# Allegro board MAIN.brd
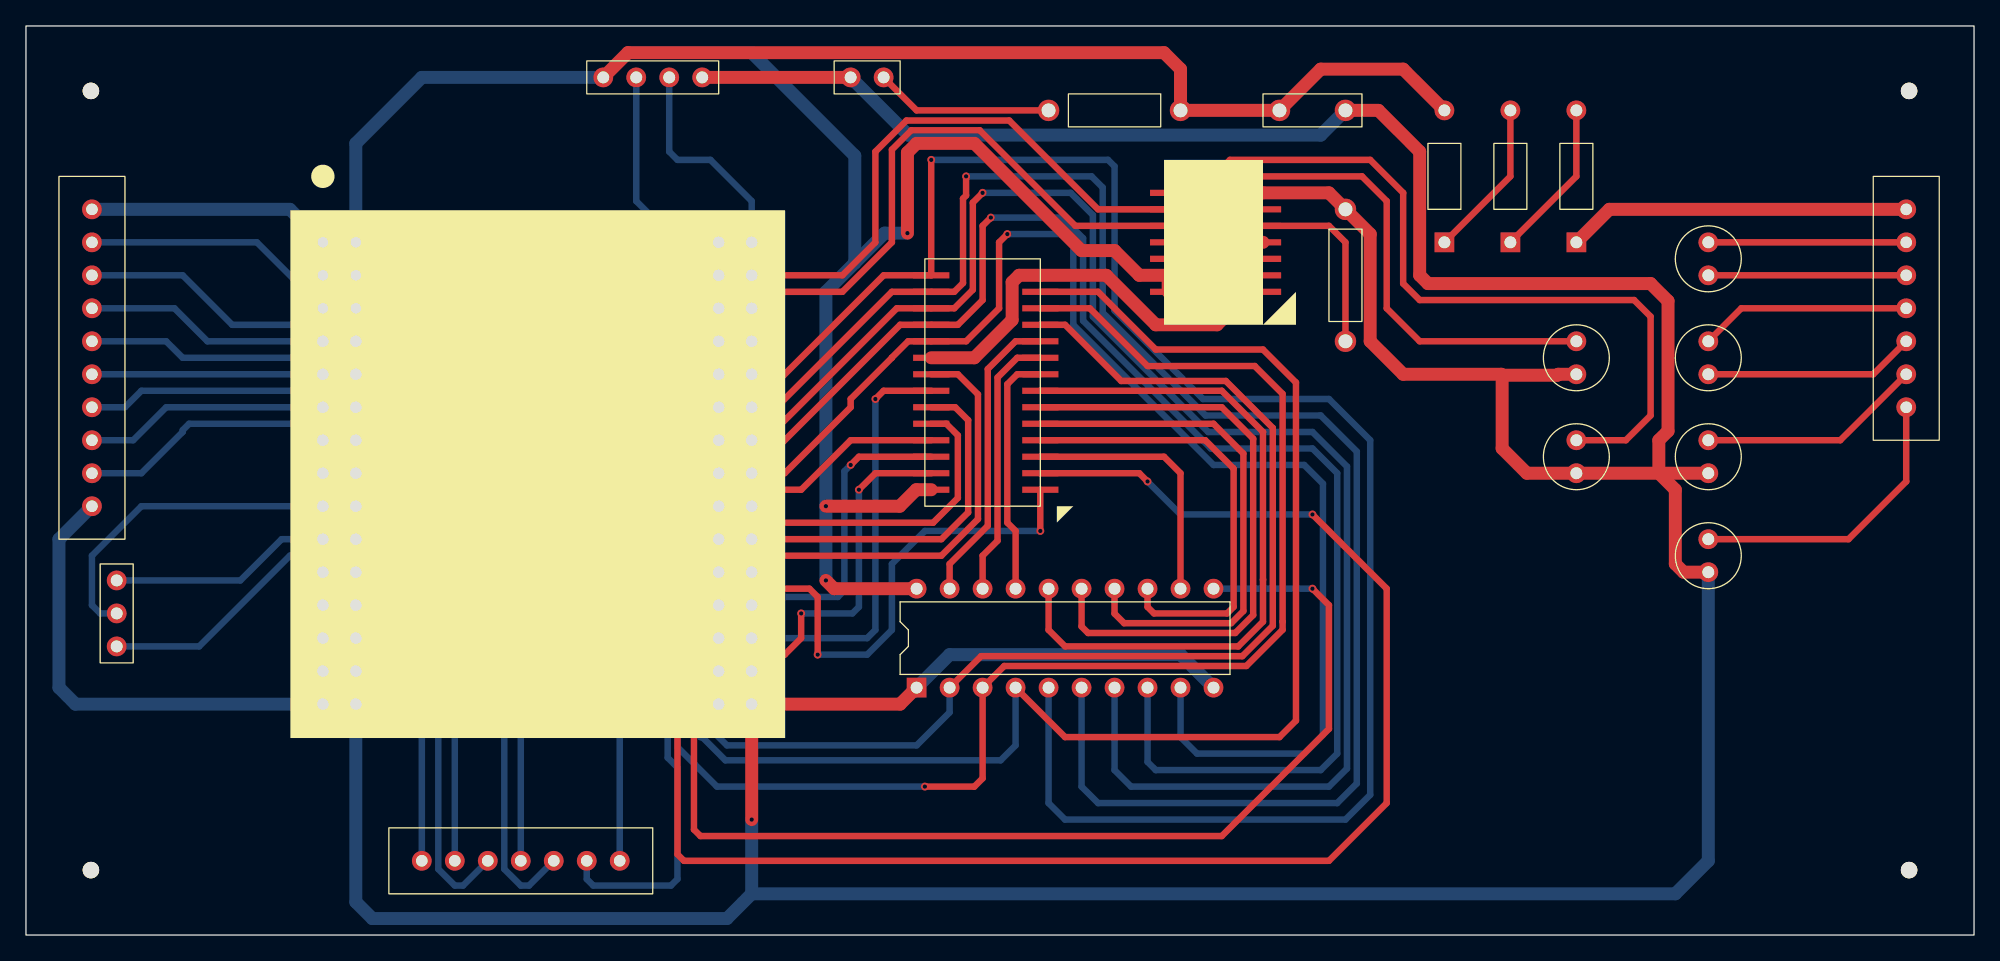
[diagram p0: board, top side]
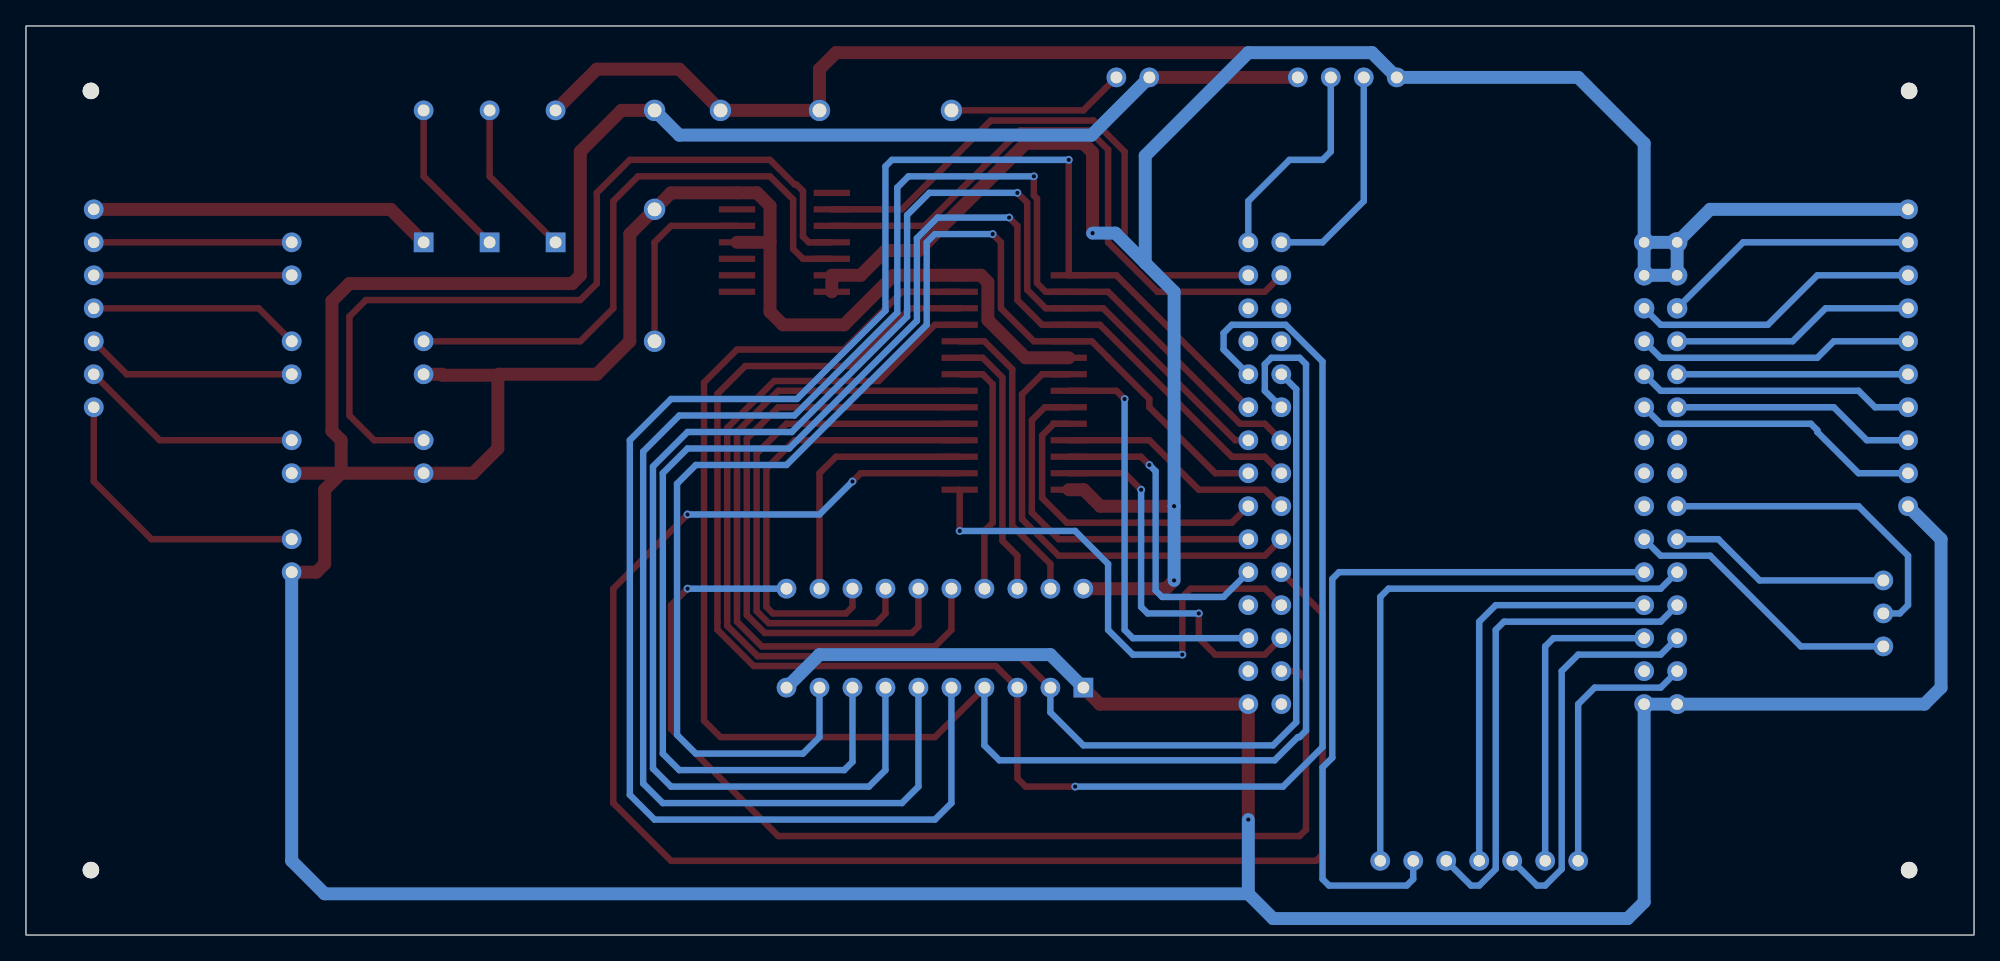
[diagram p1: board, bottom side, seen from below]

Outline 150 x 70 mm; copper layers: TOP, BOTTOM. Coordinates in mm from the lower left corner of the outline.
Outline path: rectangle 0,0 150,70

## Design rules (mm)
nets with their own width: min track width 1; nets GND VCC VDD

## Placement (name value [footprint] x y rotation side)
C1  4.7uF/6.3V  [CAP196]  129.54 53.34 180 top
C2  0.01uF  [CAPCK06]  101.6 63.5 90 top
C3  4.7uF/6.3V  [CAP196]  129.54 45.72 180 top
C4  0.1uF/25V  [CAP196]  129.54 30.48 180 top
C5  0.1uF/25V  [CAP196]  129.54 38.1 180 top
C6  0.05uF  [CAP196]  119.38 38.1 180 top
C7  0.05uF  [CAP196]  119.38 45.72 180 top
D1  DIODE  [DIO400]  109.22 53.34 0 top
D2  DIODE  [DIO400]  114.3 53.34 0 top
D3  DIODE  [DIO400]  119.38 53.34 0 top
IC1  IS62C256AL_45ULI  [SOIC127P1210X305-28N]  78.11 34.29 90 top
J1  CON_LCDBIAS  [JUMPER7]  144.78 55.88 270 top
J2  CON_LCDAK  [JUMPER2]  63.5 66.04 0 top
J3  CON_RESERVED  [JUMPER10]  5.08 55.88 270 top
J4  CON4  [JUMPER4]  44.45 66.04 0 top
J5  CON_DEVICE0  [JUMPER3]  6.99 27.3 270 top
J6  CON_LCDDATA  [JUMPER7]  45.72 5.71 180 top
NOREF  -  []  0 0 90 top
NOREF#2  -  [unnamed#2]  5 5 0 top
NOREF#3  -  []  145 65 0 top
NOREF#4  -  []  0 70 0 top
NOREF#5  -  [unnamed#2]  145 5 0 top
NOREF#6  -  []  0 0 90 top
NOREF#7  -  [unnamed#2]  145 65 0 top
NOREF#8  -  []  0 70 0 top
NOREF#9  -  []  5 65 90 top
NOREF#10  -  [unnamed#2]  5 65 0 top
R1  330  [RES400]  88.9 63.5 90 top
R2  1.25M  [RES400]  101.6 55.88 180 top
U1  ADXL202  [QC14LD]  95.25 49.53 90 top
U2  -  [ATMEGA128MCU]  22.86 53.34 270 top
U3  74HC573  [DIP20_3]  68.58 19.05 90 top

## Library data of the parts
C1 C3-C7 = CAP: Tolerance: ***; User Part Number: ***
C2 = CAP NP: Tolerance: ***; User Part Number: ***
D1-D3 = DIODE
IC1 = IS62C256AL_45ULI
J1 J6 = CON7
J2 = CON2: User Part Number: ***
J3 = CON10
J4 = CON4: User Part Number: ***
J5 = CON3: User Part Number: ***
R1 R2 = RESISTOR: Tolerance: ***; User Part Number: ***
U1 = ADXL202
U2 = ATMEGA128MCU
U3 = 74HC573: Tolerance: ***; User Part Number: ***

## Footprints (pads in the part's own frame, mm; a bottom-side part is the same pattern mirrored in y, then rotated)
ATMEGA128MCU
  round 1.575 hole 0.813: 1(0,0) 2(0,2.54) 3(2.54,0) 4(2.54,2.54) 5(5.08,0) 6(5.08,2.54)
  round 1.524 hole 0.889: 7(7.62,0) 8(7.62,2.54) 9(10.16,0) 10(10.16,2.54) 11(12.7,0) 12(12.7,2.54) 13(15.24,0) 14(15.24,2.54) 15(17.78,0) 16(17.78,2.54) 17(20.32,0) 18(20.32,2.54) 19(22.86,0) 20(22.86,2.54) 21(25.4,0) 22(25.4,2.54) 23(27.94,0) 24(27.94,2.54) 25(30.48,0) 26(30.48,2.54) 27(33.02,0) 28(33.02,2.54) 29(35.56,0) 30(35.56,2.54) 31(0,30.48) 32(0,33.02) 33(2.54,30.48) 34(2.54,33.02) 35(5.08,30.48) 36(5.08,33.02) 37(7.62,30.48) 38(7.62,33.02) 39(10.16,30.48) 40(10.16,33.02) 41(12.7,30.48) 42(12.7,33.02) 43(15.24,30.48) 44(15.24,33.02) 45(17.78,30.48) 46(17.78,33.02) 47(20.32,30.48) 48(20.32,33.02) 49(22.86,30.48) 50(22.86,33.02) 51(25.4,30.48) 52(25.4,33.02) 53(27.94,30.48) 54(27.94,33.02) 55(30.48,30.48) 56(30.48,33.02) 57(33.02,30.48) 58(33.02,33.02) 59(35.56,30.48) 60(35.56,33.02)
CAP196
  round 1.524 hole 0.914: 1(0,0) 2(0,2.54)
CAPCK06
  round 1.651 hole 1.067: 1(0,0) 2(0,5.08)
DIO400
  rect 1.524x1.524 hole 0.914: 1(0,0)
  round 1.524 hole 0.914: 2(0,10.16)
DIP20_3
  rect 1.524x1.524 hole 0.914: 1(0,0)
  round 1.524 hole 0.914: 2(0,-2.54) 3(0,-5.08) 4(0,-7.62) 5(0,-10.16) 6(0,-12.7) 7(0,-15.24) 8(0,-17.78) 9(0,-20.32) 10(0,-22.86) 11(7.62,-22.86) 12(7.62,-20.32) 13(7.62,-17.78) 14(7.62,-15.24) 15(7.62,-12.7) 16(7.62,-10.16) 17(7.62,-7.62) 18(7.62,-5.08) 19(7.62,-2.54) 20(7.62,0)
JUMPER2
  round 1.524 hole 0.914: 1(0,0) 2(2.54,0)
JUMPER3
  round 1.524 hole 0.914: 1(0,0) 2(2.54,0) 3(5.08,0)
JUMPER4
  round 1.524 hole 0.914: 1(0,0) 2(2.54,0) 3(5.08,0) 4(7.62,0)
JUMPER7
  round 1.524 hole 0.889: 1(0,0) 2(2.54,0) 3(5.08,0) 4(7.62,0) 5(10.16,0) 6(12.7,0) 7(15.24,0)
JUMPER10
  round 1.524 hole 0.889: 1(0,0) 2(2.54,0) 3(5.08,0) 4(7.62,0) 5(10.16,0) 6(12.7,0) 7(15.24,0) 8(17.78,0) 9(20.32,0) 10(22.86,0)
QC14LD
  rect 0.483x2.794 smd: 1(0,0) 2(1.27,0) 3(2.54,0) 4(3.81,0) 5(5.08,0) 6(6.35,0) 7(7.62,0) 8(7.62,7.3) 9(6.35,7.3) 10(5.08,7.3) 11(3.81,7.3) 12(2.54,7.3) 13(1.27,7.3) 14(0,7.3)
RES400
  round 1.651 hole 1.067: 1(0,0) 2(0,10.16)
SOIC127P1210X305-28N
  rect 0.483x2.794 smd: 1(0,0) 2(1.27,0) 3(2.54,0) 4(3.81,0) 5(5.08,0) 6(6.35,0) 7(7.62,0) 8(8.89,0) 9(10.16,0) 10(11.43,0) 11(12.7,0) 12(13.97,0) 13(15.24,0) 14(16.51,0) 15(16.51,8.4) 16(15.24,8.4) 17(13.97,8.4) 18(12.7,8.4) 19(11.43,8.4) 20(10.16,8.4) 21(8.89,8.4) 22(7.62,8.4) 23(6.35,8.4) 24(5.08,8.4) 25(3.81,8.4) 26(2.54,8.4) 27(1.27,8.4) 28(0,8.4)
unnamed#2
  round 1.27 hole 3.962 unplated: (0,0)

## Nets
GND: C2.1 C4.2 C5.2 C6.2 C7.2 IC1.14(GND) IC1.20(C\E\) J2.1 J3.10 J4.4 R2.1 U1.4(COM) U1.7(COM2) U2.29(GND0) U2.30(GND1) U2.60(GND2) U3.1(O\E\) U3.10
VCC: C2.2 D1.2(A) IC1.28(VDD) J3.1 J4.1 R1.1 U1.13(VDD) U1.14(VDD2) U2.1(VCC0) U2.2(VCC1) U2.3(AVCC) U2.4(AREF) U3.20
VDD: D3.1(K) J1.1
A8: IC1.25(A8) U2.47(C0)
A9: IC1.24(A9) U2.48(C1)
A10: IC1.21(A10) U2.49(C2)
A11: IC1.23(A11) U2.50(C3)
A12: IC1.2(A12) U2.51(C4)
A13: IC1.26(A13) U2.52(C5)
A14: IC1.1(A14) U2.53(C6)
ACCL_X: U1.10(XOUT) U2.33(F2)
ACCL_Y: U1.9(YOUT) U2.34(F3)
DA0: IC1.11(I_O0) U2.39(A0) U3.2(D0)
DA1: IC1.12(I_O1) U2.40(A1) U3.3(D1)
DA2: IC1.13(I_O2) U2.41(A2) U3.4(D2)
DA3: IC1.15(I_O3) U2.42(A3) U3.5(D3)
DA4: IC1.16(I_O4) U2.43(A4) U3.6(D4)
DA5: IC1.17(I_O5) U2.44(A5) U3.7(D5)
DA6: IC1.18(I_O6) U2.45(A6) U3.8(D6)
DA7: IC1.19(I_O7) U2.46(A7) U3.9(D7)
FSR0: J4.2 U2.31(F0)
FSR1: J4.3 U2.32(F1)
LCDCD: J6.7 U2.27(D6)
LCDD0: J6.1 U2.21(D0)
LCDD1: J6.2 U2.22(D1)
LCDD2: J6.3 U2.23(D2)
LCDD3: J6.4 U2.24(D3)
LCDWR0: J6.5 U2.25(D4)
LCDWR1: J6.6 U2.26(D5)
OE_: IC1.22(O\E\) U2.56(G1)
SARVO: J5.1 U2.19(B6)
SPK0: J5.2 U2.17(B4)
SPK1: J5.3 U2.20(B7)
VB0+: C3.1 J1.4
VB0-: C3.2 J1.5
VB1+: C1.1 J1.2
VB1-: C1.2 J1.3
VBIAS: C4.1 J1.7
VLCD: C5.1 J1.6
WR_: IC1.27(W\E\) U2.55(G0)
N06229: IC1.10(A0) U3.19(Q0)
N06233: IC1.9(A1) U3.18(Q1)
N06239: IC1.7(A3) U3.16(Q3)
N06243: IC1.8(A2) U3.17(Q2)
N06251: IC1.3(A7) U3.12(Q7)
N06255: IC1.5(A5) U3.14(Q5)
N06259: IC1.6(A4) U3.15(Q4)
N06263: IC1.4(A6) U3.13(Q6)
N06273: U2.57(G2) U3.11(L\E\)
N08119: D2.1(K) D3.2(A)
N08145: D1.1(K) D2.2(A)
N08304: J2.2 R1.2
N12621: J3.2 U2.5(E0)
N12677: J3.3 U2.6(E1)
N12689: J3.4 U2.7(E2)
N13066: J3.5 U2.8(E3)
N13078: J3.6 U2.9(E4)
N13592: J3.7 U2.10(E5)
N13604: J3.8 U2.11(E6)
N13619: J3.9 U2.12(E7)
N15084: C6.1 U1.11(YFILT)
N15088: C7.1 U1.12(XFILT)
N15670: R2.2 U1.5(T2)

Pads without a net: U1 1 2 3 6 8; U2 13 14 15 16 18 28 35 36 37 38 54 58 59

## Via types
v1: diameter 0.61, hole 0.33, TOP to BOTTOM, 19 vias

## Routing (per net, layer and track width the routed paths; a pad name or vN(x,y) marks a point on that pad's centre or on a via; arc(x,y) is an arc through that point)
GND: length 447.8
  TOP w1: v1(55.88,8.89) U2.60 67.31,17.78 U3.1 ; IC1.20 73.03,44.45 75.93,47.36 75.93,50.27 76.47,50.8 IC1.14 83.19,50.8 87,46.99 91.71,46.99 92.71,47.99 92.71,53.34 ; 125.73,35.56 C5.2 ; 125.73,35.56 125.73,38.1 126.44,38.81 126.44,48.82 125.09,50.16 107.95,50.16 107.31,50.8 107.31,60.33 104.14,63.5 C2.1 ; 125.73,35.56 C6.2 115.57,35.56 113.67,37.47 113.67,43.11 ; 125.73,35.56 127,34.29 127,28.57 127.64,27.94 C4.2 ; 92.71,53.34 U1.4 ; 92.71,53.34 92.71,56.15 93.71,57.15 U1.7 100.33,57.15 R2.1 103.5,53.98 103.5,45.72 106.05,43.18 113.59,43.18 113.67,43.11 ; 113.67,43.11 117.92,43.11 117.99,43.18 C7.2 ; J2.1 J4.4
  BOTTOM w1: J2.1 67.94,61.59 99.69,61.59 C2.1 ; v1(55.88,8.89) 55.88,3.17 ; 55.88,3.17 53.98,1.27 26.67,1.27 25.4,2.54 U2.30 U2.29 3.81,17.78 2.54,19.05 2.54,30.48 J3.10 ; 55.88,3.17 127,3.17 129.54,5.71 C4.2 ; U3.1 71.12,21.59 88.9,21.59 U3.10
VCC: length 239.7
  TOP w1: v1(67.87,54.05) 67.87,60.25 68.58,60.96 73.03,60.96 81.28,52.7 83.82,52.7 85.72,50.8 U1.13 U1.14 ; D1.2 106.05,66.67 99.69,66.67 C2.2 R1.1 88.9,66.67 87.63,67.94 46.35,67.94 J4.1 ; v1(61.59,27.3) 62.23,26.67 U3.20 ; v1(61.59,33.02) 67.28,33.02 68.55,34.29 IC1.28
  BOTTOM w1: U2.1 20.32,55.88 J3.1 ; U2.1 U2.2 ; U2.1 U2.3 U2.4 U2.2 ; U2.2 25.4,60.96 30.48,66.04 J4.1 46.35,67.94 55.88,67.94 63.82,60.01 63.82,51.75 ; 63.82,51.75 61.59,49.53 v1(61.59,33.02) v1(61.59,27.3) ; 63.82,51.75 66.11,54.05 v1(67.87,54.05)
VDD: length 26.5
  TOP w1: J1.1 121.92,55.88 D3.1
A8: length 18.5
  TOP w0.5: IC1.25 63.5,38.1 59.69,34.29 54.61,34.29 U2.47
A9: length 24.4
  TOP w0.5: IC1.24 70.86,39.37 71.75,38.48 71.75,33.66 69.85,31.75 57.15,31.75 U2.48
A10: length 35.5
  TOP w0.5: IC1.21 71.75,43.18 73.3,41.63 73.3,32.03 70.49,29.21 54.61,29.21 U2.49
A11: length 27.9
  TOP w0.5: IC1.23 71.55,40.64 72.55,39.64 72.55,32.54 70.48,30.48 U2.50
A12: length 126.6
  TOP w0.5: v1(86.36,34.92) 85.72,35.56 IC1.2 ; v1(99.06,32.38) 104.78,26.67 104.78,10.16 100.33,5.71 50.66,5.71 50.16,6.21 50.16,24.77 U2.51
  BOTTOM w0.5: v1(99.06,32.38) 88.9,32.38 v1(86.36,34.92)
A13: length 24.5
  TOP w0.5: IC1.26 64.14,36.83 v1(63.5,36.2)
  BOTTOM w0.5: v1(63.5,36.2) 63.02,35.71 63.02,26.54 62.52,26.04 57.78,26.04 U2.52
A14: length 40.1
  TOP w0.5: U2.53 54.61,26.67 60.33,26.67 60.96,26.04 v1(60.96,21.59) ; IC1.1 v1(78.11,31.11)
  BOTTOM w0.5: v1(60.96,21.59) 64.77,21.59 66.67,23.5 66.67,28.57 69.22,31.11 v1(78.11,31.11)
ACCL_X: length 47.5
  TOP w0.5: U2.33 54.61,49.53 62.87,49.53 66.67,53.34 66.67,60.48 68.17,61.97 73.44,61.97 80.8,54.61 U1.10
ACCL_Y: length 43.9
  TOP w0.5: U2.34 62.87,50.8 65.41,53.34 65.41,60.33 67.8,62.72 75.71,62.72 82.55,55.88 U1.9
DA0: length 113.2
  TOP w0.5: IC1.11 80.01,46.99 84.34,42.66 92.39,42.66 96,39.05 96,23.82 93.66,21.47 73.54,21.47 U3.2
  BOTTOM w0.5: U3.2 71.12,17.14 68.58,14.61 53.98,14.61 52.19,16.39 52.19,42.03 U2.39
DA1: length 139.2
  TOP w0.5: IC1.12 81.92,48.26 86.36,43.81 94.61,43.81 96.76,41.67 96.76,24.13 96.76,24.13 96.76,23.51 93.97,20.72 75.33,20.72 U3.3 73.66,12.06 73.03,11.43 v1(69.22,11.43)
  BOTTOM w0.5: v1(69.22,11.43) 53.2,11.43 50.16,14.47 50.16,44.16 53,46.99 57.15,46.99 57.78,46.35 57.78,45.09 U2.40
DA2: length 138.6
  TOP w0.5: IC1.13 82.55,49.53 87,45.09 95.25,45.09 97.79,42.55 97.79,16.51 96.52,15.24 80.01,15.24 U3.4
  BOTTOM w0.5: U2.41 54.61,41.91 54.61,43.95 54.11,44.45 51.94,44.45 51.44,43.95 51.44,15.74 51.94,15.24 52.07,15.24 53.86,13.45 75.05,13.45 76.2,14.61 U3.4
DA3: length 138.4
  TOP w0.5: v1(69.7,59.69) IC1.15 66.04,50.8 U2.42
  BOTTOM w0.5: U3.5 78.74,10.16 80.01,8.89 101.6,8.89 103.5,10.79 103.5,38.1 100.33,41.27 90.63,41.27 83.82,48.08 83.82,59.19 83.32,59.69 v1(69.7,59.69)
DA4: length 132.2
  TOP w0.5: v1(72.39,58.42) 72.39,56.95 72.15,56.71 72.15,50.2 71.48,49.53 IC1.16 66.67,49.53 56.52,39.37 54.61,39.37 U2.43
  BOTTOM w0.5: v1(72.39,58.42) 82.05,58.42 82.91,57.56 82.91,47.93 90.83,40.01 99.69,40.01 102.47,37.23 102.47,11.67 100.97,10.16 82.55,10.16 81.28,11.43 U3.6
DA5: length 119.6
  TOP w0.5: U2.44 56.89,38.1 67.05,48.26 IC1.17 71.48,48.26 72.91,49.69 72.91,56.4 v1(73.66,57.15)
  BOTTOM w0.5: v1(73.66,57.15) 80.44,57.15 82.15,55.44 82.15,47.62 91.03,38.73 99.06,38.73 101.72,36.08 101.72,12.82 100.33,11.43 85.09,11.43 83.82,12.7 U3.7
DA6: length 113.7
  TOP w0.5: U2.45 54.61,36.83 57.15,36.83 67.31,46.99 IC1.18 71.75,46.99 73.66,48.9 73.66,54.61 v1(74.3,55.24)
  BOTTOM w0.5: U3.8 86.36,13.34 87,12.7 99.69,12.7 100.97,13.97 100.97,35.56 99.06,37.47 91.24,37.47 81.4,47.3 81.4,53.65 79.81,55.24 v1(74.3,55.24)
DA7: length 101.9
  TOP w0.5: v1(75.56,53.98) 74.93,53.34 74.93,48.26 72.39,45.72 IC1.19 67.93,45.72 66.67,44.47 66.67,44.45 63.5,41.27 63.5,40.64 58.42,35.56 U2.46
  BOTTOM w0.5: U3.9 88.9,15.24 90.17,13.97 98.42,13.97 99.87,15.41 99.87,34.75 98.42,36.2 91.44,36.2 80.64,46.99 80.64,53.34 80.01,53.98 v1(75.56,53.98)
FSR0: length 17.2
  BOTTOM w0.5: U2.31 50.16,53.34 46.99,56.52 J4.2
FSR1: length 16.8
  BOTTOM w0.5: J4.3 49.53,60.33 50.16,59.69 52.7,59.69 55.88,56.52 U2.32
LCDCD: length 20.7
  BOTTOM w0.5: J6.7 30.48,17.78 29.21,19.05 24.13,19.05 U2.27
LCDD0: length 44
  BOTTOM w0.5: U2.21 24.13,26.67 45.09,26.67 45.72,26.04 J6.1
LCDD1: length 56.5
  BOTTOM w0.5: U2.22 48.9,27.94 49.41,27.42 49.41,13.66 50.16,12.9 50.16,4.31 49.66,3.81 43.68,3.81 43.18,4.31 J6.2
LCDD2: length 38.3
  BOTTOM w0.5: J6.3 38.73,3.81 38.1,3.81 36.83,5.08 36.83,23.5 36.2,24.13 24.13,24.13 U2.23
LCDD3: length 31.6
  BOTTOM w0.5: U2.24 36.83,25.4 38.1,24.13 J6.4
LCDWR0: length 30.3
  BOTTOM w0.5: J6.5 33.66,3.81 33.02,3.81 31.75,5.08 31.75,20.32 30.48,21.59 24.13,21.59 U2.25
LCDWR1: length 24.4
  BOTTOM w0.5: U2.26 32.38,22.86 33.02,22.23 J6.6
OE_: length 32.1
  TOP w0.5: v1(65.41,41.27) 66.04,41.91 IC1.22
  BOTTOM w0.5: v1(65.41,41.27) 65.41,23.5 64.77,22.86 U2.56
SARVO: length 17.2
  BOTTOM w0.5: J5.1 16.51,27.3 19.68,30.48 U2.19
SPK0: length 25.3
  BOTTOM w0.5: J5.2 5.71,24.77 5.08,25.4 5.08,29.21 8.89,33.02 U2.17
SPK1: length 21.8
  BOTTOM w0.5: J5.3 13.34,22.23 20.32,29.21 24.13,29.21 U2.20
VB0+: length 16.3
  TOP w0.5: J1.4 132.08,48.26 C3.1
VB0-: length 16.3
  TOP w0.5: J1.5 142.24,43.18 C3.2
VB1+: length 15.2
  TOP w0.5: C1.1 J1.2
VB1-: length 15.2
  TOP w0.5: C1.2 J1.3
VBIAS: length 22.8
  TOP w0.5: J1.7 144.78,34.92 140.34,30.48 C4.1
VLCD: length 17.3
  TOP w0.5: J1.6 139.7,38.1 C5.1
WR_: length 29.1
  TOP w0.5: IC1.27 65.41,35.56 v1(64.14,34.29) ; U2.55 54.61,21.59 58.42,21.59 59.69,22.86 v1(59.69,24.77)
  BOTTOM w0.5: v1(64.14,34.29) 64.14,25.27 63.63,24.77 v1(59.69,24.77)
N06229: length 23.1
  TOP w0.5: IC1.10 76.2,45.72 74.06,43.58 74.06,31.51 71.12,28.57 U3.19
N06233: length 20.7
  TOP w0.5: IC1.9 76.33,44.45 74.81,42.93 74.81,30.36 73.66,29.21 U3.18
N06239: length 54.1
  TOP w0.5: U3.16 78.74,23.5 80.01,22.23 93.34,22.23 95.25,24.13 95.25,27.36 95.25,27.37 95.25,38.73 92.08,41.91 IC1.7
N06243: length 18.9
  TOP w0.5: IC1.8 76.33,43.18 75.56,42.41 75.56,31.75 76.2,31.11 U3.17
N06251: length 20.2
  TOP w0.5: IC1.3 87.63,36.83 88.9,35.56 U3.12
N06255: length 41.2
  TOP w0.5: IC1.5 91.44,39.37 93.74,37.07 93.74,24.95 92.8,24.01 84.56,24.01 83.82,24.75 U3.14
N06259: length 47.9
  TOP w0.5: IC1.6 92.08,40.64 94.5,38.22 94.5,24.64 93.11,23.26 81.78,23.26 81.28,23.76 U3.15
N06263: length 34.9
  TOP w0.5: U3.13 86.36,25.27 86.86,24.77 92.49,24.77 92.99,25.27 92.99,35.92 90.81,38.1 IC1.4
N06273: length 85.2
  TOP w0.5: U2.57 52.07,20.32 51.44,19.68 51.44,8.12 51.94,7.62 92.08,7.62 100.33,15.88 100.33,25.4 v1(99.06,26.67)
  BOTTOM w0.5: v1(99.06,26.67) U3.11
N08119: length 12.3
  TOP w0.5: D3.2 119.38,58.42 D2.1
N08145: length 12.3
  TOP w0.5: D1.1 114.3,58.42 D2.2
N08304: length 13.8
  TOP w0.5: R1.2 68.58,63.5 J2.2
N12621: length 19.9
  BOTTOM w0.5: U2.5 17.78,53.34 J3.2
N12677: length 22.4
  BOTTOM w0.5: U2.6 24.13,46.99 15.88,46.99 12.06,50.8 J3.3
N12689: length 18.8
  BOTTOM w0.5: U2.7 13.97,45.72 11.43,48.26 J3.4
N13066: length 21.4
  BOTTOM w0.5: U2.8 24.13,44.45 12.06,44.45 10.79,45.72 J3.5
N13078: length 17.8
  BOTTOM w0.5: U2.9 J3.6
N13592: length 21.4
  BOTTOM w0.5: J3.7 7.62,40.64 8.89,41.91 24.13,41.91 U2.10
N13604: length 18.8
  BOTTOM w0.5: J3.8 8.26,38.1 10.79,40.64 U2.11
N13619: length 22.5
  BOTTOM w0.5: U2.12 24.13,39.37 12.56,39.37 12.06,38.87 12.06,38.73 8.89,35.56 J3.9
N15084: length 65
  TOP w0.5: C6.1 123.19,38.1 125.09,40.01 125.09,47.62 123.83,48.9 107.31,48.9 106.05,50.16 106.05,57.15 103.5,59.69 92.71,59.69 90.81,57.78 90.67,57.78 90.17,57.28 90.17,53.78 89.72,53.34 U1.11
N15088: length 46.4
  TOP w0.5: U1.12 90.17,52.07 90.92,52.83 90.92,56.63 92.71,58.42 102.87,58.42 104.78,56.52 104.78,48.26 107.31,45.72 C7.1
N15670: length 14.5
  TOP w0.5: R2.2 101.6,53.34 100.33,54.61 U1.5

## Text on the board
DIMENSION: FIGURE | SIZE | 0.33 | 0.813 | 0.889 | 0.914 | 1.067 | 3.962 | DRILL CHART: TOP to BOTTOM | ALL UNITS ARE IN MILLIMETERS | PLATED | NON-PLATED | QTY | 19 | 6 | 78 | 47 | 4
